# Altium PCB handm_altimeter.PcbDoc
Units mm, origin at the board's own origin, x right, y up, seen from the top; angles counter-clockwise.
Board outline 19 x 29 mm, 2 copper layers (Top Layer, Bottom Layer); 16 components, 14 nets, 60 pads, 16 vias.
Unrouted connection lines stored in the file: 2.
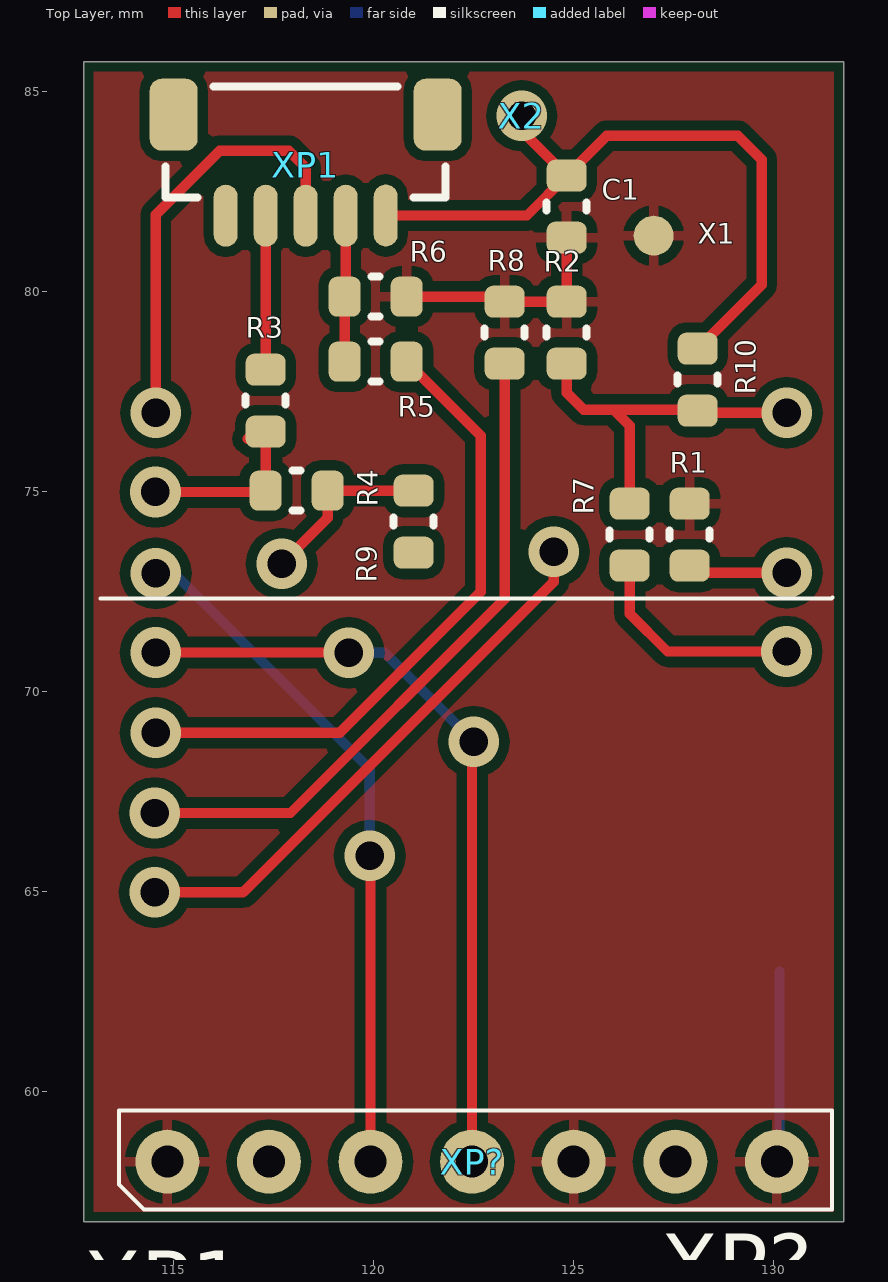
[diagram p0: Top Layer view]
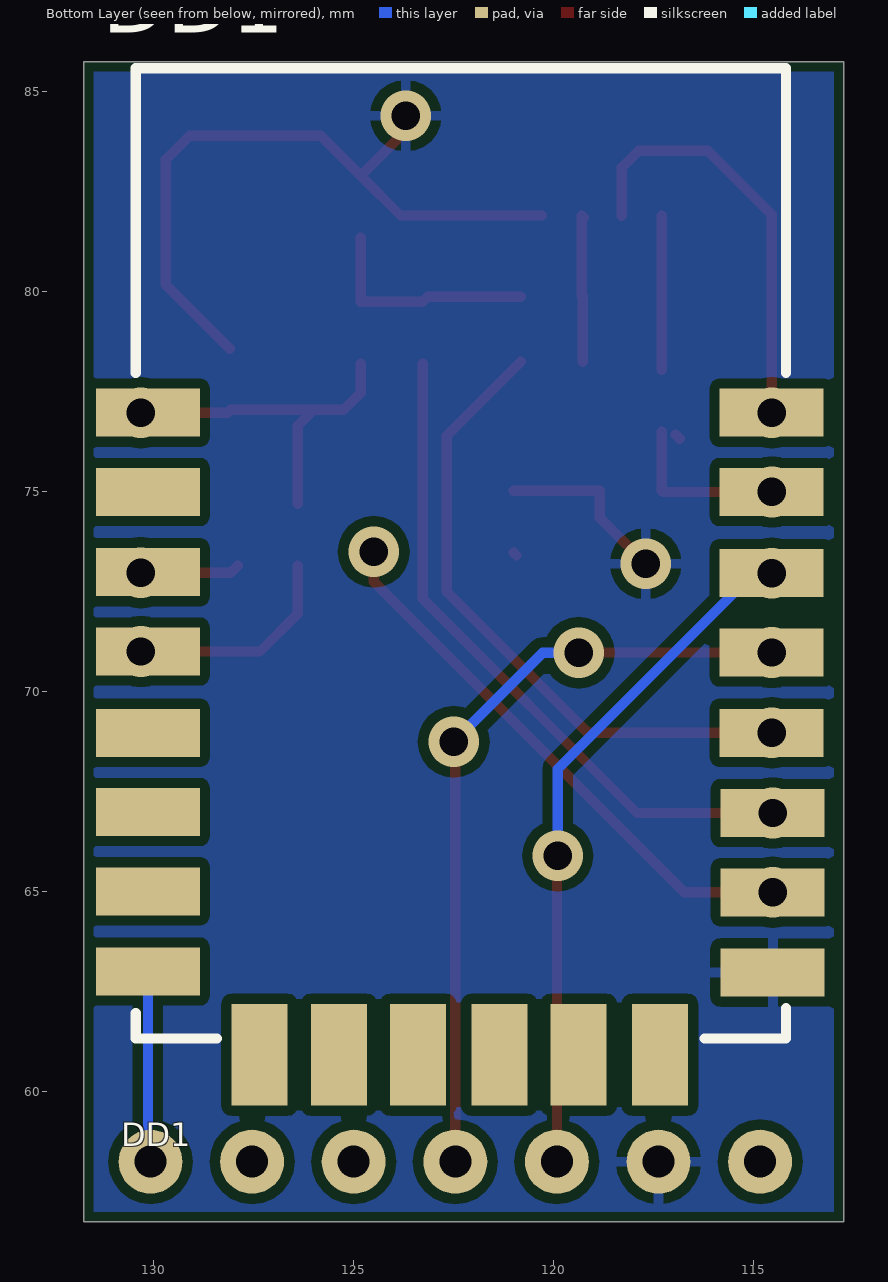
[diagram p1: Bottom Layer view, seen from below]
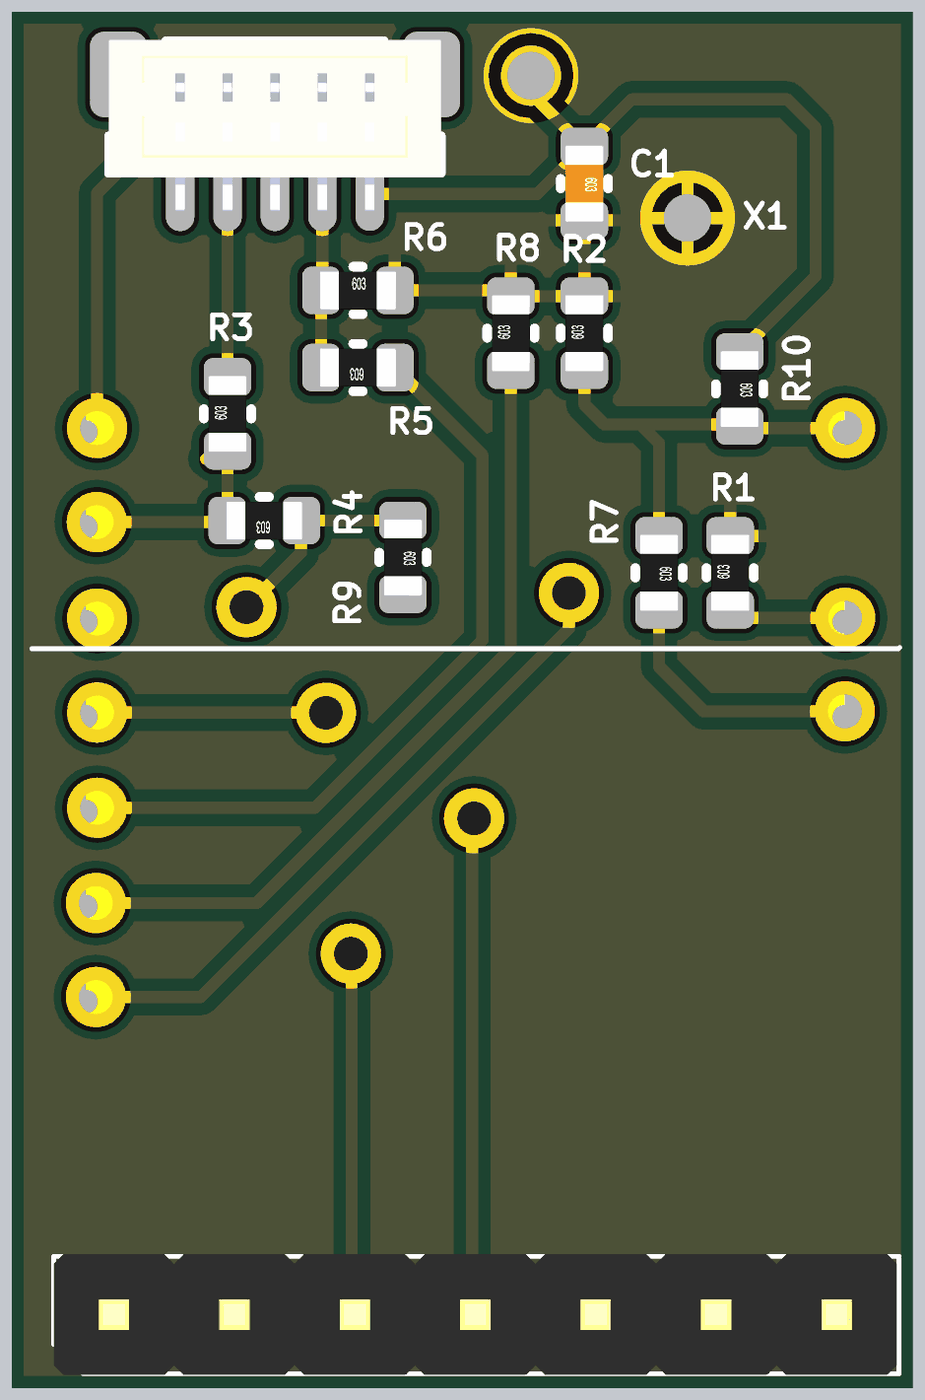
[diagram p2: 3D render of the assembled board from above, using the file's embedded part models]

## Layer stack, top to bottom
Top Solder: solder mask 0.0102, Solder Resist, Dk 3.5
Top Layer: signal copper 0.0356
Dielectric 1: dielectric 0.32, FR-4, Dk 4.8
Bottom Layer: signal copper 0.0356
Bottom Solder: solder mask 0.0102, Solder Resist, Dk 3.5

## Board outline
112.75,56.75 112.75,85.75 131.75,85.75 131.75,56.75

## Design rules (kind name [scope] priority, off if disabled: settings)
Clearance [All] p1: gap=0.254 ignorepadtopadclearanceinfootprint=FALSE except(0: Arc-Hole Track-Hole SMDPad-Hole THPad-Hole Via-Hole Fill-Hole Poly-Hole Region-Hole Text-Hole)
PolygonConnect [All] p1: connectstyle=Relief reliefconductorwidth=0.254 reliefentries=4 polygonreliefangle="90 Angle" airgapwidth=0.254
RoutingVias [All] p1: holewidth=0.711 width=1.27 viastyle="Through Hole" minholewidth=0.711 minwidth=1.27 maxholewidth=0.711 maxwidth=1.27
SolderMaskExpansion [All] p1: expansion=0.102
Width [All] p1: maxlimit=0.254 minlimit=0.254 preferedwidth=0.254
30 further rules are at their usual default settings.

## Components (designator, comment, footprint, x,y, rotation, side; value= is the part's Value field where it differs from the comment)
C1 "Cap EIA 0603" "CAP EIA 0603" 124.825,82.125 r270 top value=0.1uF
DD1 "ESP8266-12E" "ESP8266 ESP-12-E" 113.559,60.567 r180 bottom
R1 "Res EIA 0603" "RES EIA 0603" 127.9,73.925 r90 top value=10k
R2 "Res EIA 0603" "RES EIA 0603" 124.825,78.975 r90 top value=10k
R3 "Res EIA 0603" "RES EIA 0603" 117.3,77.275 r90 top value=10k
R4 "Res EIA 0603" "RES EIA 0603" 118.075,75.025 r180 top value=22k
R5 "BURN" "RES EIA 0603" 120.05,78.25 r180 top
R6 "Res EIA 0603" "RES EIA 0603" 120.05,79.875 r0 top value=10k
R7 "Res EIA 0603" "RES EIA 0603" 126.4,73.925 r270 top value=470
R8 "Res EIA 0603" "RES EIA 0603" 123.275,78.975 r90 top value=10k
R9 "Res EIA 0603" "RES EIA 0603" 121,74.25 r270 top value=10k
R10 "Res EIA 0603" "RES EIA 0603" 128.1,77.8 r270 top value=0
X1 "V_Bat+" "Pin - Referal" 127,81.4 r0 top value="Generic Pin Contact Referal"
X2 "V_Bat_GND" "Pin - Referal" 123.7,84.4 r0 top value="Generic Pin Contact Referal"
XP1 "BM05B-SRSS-TB" BM05B-SRSS-TB 118.3,83.625 r0 top value="Разъем штыревой 5-и контактный угловой"
XP? "PLS-7v1" PLS-7v1 122.46,58.25 r0 top

## Footprints (in the part's own frame and the unit in brackets; to place one, negate y for a bottom-side part, rotate by r counter-clockwise, add the part's x,y. Pads: shape width x height; smd on the part's side, far side on the other; paste and mask are expansions set on the pad)
BM05B-SRSS-TB [mm]
  rrect50% 1.2x1.8 smd: 0(-3.3,0.8) 0(3.3,0.8)
  oval 0.6x1.55 smd: 1(-2,-1.725) 2(-1,-1.725) 3(0,-1.725) 4(1,-1.725) 5(2,-1.72)
  silkscreen extent -3.5,-1.28 3.5,1.5, body extent -3.5,-2.07 3.5,1.53, height 4.25
"CAP EIA 0603" [mm] "Chip Resistor, 2-Leads, Body 1.57x0.85mm, IPC Medium Density"
  rrect50% 0.8x1 smd: 1(-0.775,0) 2(0.775,0)
  silkscreen extent -0.1,-0.5 0.1,0.5, body extent -0.8,-0.4 0.8,0.4, height 0.3
"ESP8266 ESP-12-E" [mil] "ESP8266 ESP-12-E"
  rect 102.36x47.24 smd: 1(-653,646) 2(-653,568) 3(-653,489) 4(-653,411) 5(-653,331) 6(-653,253) 7(-653,175) 8(-653,96) 15(-38,95) 16(-38,174) 17(-38,252) 18(-39,331) 19(-39,410) 20(-39,488) 21(-39,568) 22(-39,646)
  rect 55x100 smd: 9(-543,14) 10(-465,14) 11(-387,14) 12(-307,14) 13(-229,14) 14(-149,14)
  silkscreen extent -665,30 -25,985, body extent -660,32 -29,977, height 104
"Pin - Referal" [mm]
  round 1 smd mask+0.5: 1(0,0)
PLS-7v1 [mm]
  round 1.6 hole 0.8: 1(-7.62,0) 2(-5.08,0) 3(-2.54,0) 4(0,0) 5(2.54,0) 6(5.08,0) 7(7.62,0)
  silkscreen extent -8.82,-1.2 9,1.28, body extent -8.82,-1.22 8.96,1.32, height 8.54
"RES EIA 0603" [mm] "Chip Resistor, 2-Leads, Body 1.57x0.85mm, IPC Medium Density"
  rrect50% 0.8x1 smd: 1(-0.775,0) 2(0.775,0)
  silkscreen extent -0.1,-0.5 0.1,0.5, body extent -0.8,-0.4 0.8,0.4, height 0.3

## Part data
DD1: library part "ESP8266 ESP-12E-RU"
R5: library part "Res EIA 0603", Group=Резисторы
X1 X2: library part Pin_Referal, "Generic Pin Contact", Manufacturer=-, Group=-, Name=-, Supplier=-
XP1: "5-Pin Angle Connector", Manufacturer=JST, Group=Разъемы, Name=BM05B-SRSS-TB, Supplier="ООО\"Компэл\""
C1: Group=Конденсаторы
R1 R2 R3 R4 R6 R7 R8 R9 R10: Group=Резисторы

## Via types
v1: diameter 1.27, hole 0.711, Top Layer to Bottom Layer, 16 vias

## Nets (pads, with @x,y where several pads share a name; then routed paths per layer and width w, separated by ;. In a path a pad name is that pad's centre, name@x,y a point inside that pad or via, vN(x,y) a via of type N, cw(c..) or ccw(c..) an arc to the next point about the centre after c; other vN are vias at no path point)
+3.3V: C1.2 DD1.8 R1.2 R2.2 R6.2 R8.2 X1.1 XP?.1 XP?.5 XP?.7 | length 10.4
  Top Layer w0.254: R6.2 123.15,79.875 R8.2 R2.2 C1.2
  Bottom Layer w0.254: XP?.7 130.146,58.316 DD1.8
Ardu_RX: R3.2 XP1.2 | length 3.8
  Top Layer w0.254: R3.2 XP1.2
Ardu_TX: DD1.22 XP1.3 | length 10.7
  Top Layer w0.254: v1(114.55,76.975) 114.55,81.925 116.15,83.525 117.875,83.525 118.3,83.1 XP1.3
DTR: R5.2 R6.1 XP1.4 | length 3.7
  Top Layer w0.254: XP1.4@119.25,81.85 XP1.4 119.3,79.9 R6.1 R5.2
GND: C1.1 DD1.15 R4.1 R9.1 R10.1 X2.1 XP1.5 XP?.2 | length 22.3
  Top Layer w0.254: v1(117.7,73.2) 118.85,74.35 R4.1 R9.1 ; XP1.5 123.83,81.905 C1.1 ; v1(123.7,84.4) 123.7,84.025 C1.1 ; R10.1 129.7,80.175 129.7,83.3 129.1,83.9 125.825,83.9 C1.1
NetDD1_3: DD1.3 R1.1 | length 2.5
  Top Layer w0.254: R1.1 128.075,72.975 v1(130.325,72.975)
NetDD1_4: DD1.4 R7.2 | length 5.7
  Top Layer w0.254: R7.2 126.4,71.95 127.344,71.006 v1(130.319,71.006)
  Bottom Layer w0.254: DD1.4 v1(130.319,71.006)
NetDD1_16: DD1.16 R9.2 | length 14
  Top Layer w0.254: v1(114.525,64.986) 116.736,64.986 124.5,72.75 v1(124.5,73.5) ; R9.2@120.931,73.406 R9.2
NetDD1_17: DD1.17 R8.1 | length 16.8
  Top Layer w0.254: v1(114.525,66.967) 117.917,66.967 123.275,72.325 R8.1
NetDD1_18: DD1.18 R5.1 | length 16.1
  Top Layer w0.254: v1(114.55,68.974) 119.149,68.974 122.675,72.5 122.675,76.4 R5.1
NetDD1_21: DD1.21 R3.1 R4.2 | length 4.4
  Top Layer w0.254: v1(114.544,74.994) 117.269,74.994 R4.2 R3.1 ; R3.1@116.85,76.325 R3.1@116.95,76.425
  Bottom Layer w0.254: v1(114.544,74.994) DD1.21
RTS: DD1.1 R2.1 R7.1 R10.2 XP1.1 | length 9.1
  Top Layer w0.254: R2.1 124.825,77.475 125.25,77.05 126,77.05 ; R7.1 126.4,76.65 126,77.05 ; v1@130.25,77.05 v1(130.325,76.975) 128.15,76.975 R10.2 128.075,77.05 126,77.05
  Bottom Layer w0.254: v1(130.325,76.975) DD1.1@130.4,76.975
SCL: DD1.20 XP?.3 | length 17.2
  Top Layer w0.254: v1(119.9,65.9) 119.92,65.88 XP?.3
  Bottom Layer w0.254: v1(114.55,72.962) 115.008,72.962 119.9,68.069 v1(119.9,65.9)
SDA: DD1.19 XP?.4 | length 19.4
  Top Layer w0.254: v1(114.55,70.981) 119.369,70.981 v1(119.375,70.975) ; XP?.4 122.46,68.71 v1(122.5,68.75)
  Bottom Layer w0.254: v1(119.375,70.975) 120.275,70.975 v1(122.5,68.75)
pads on no net: DD1.2 DD1.5 DD1.6 DD1.7 DD1.9 DD1.10 DD1.11 DD1.12 DD1.13 DD1.14 XP1.0 XP?.6

## Polygon pours and split planes (outlines as drawn)
+3.3V on Top Layer "Top Layer-No Net" (solid, pour order 0): 113,57 131.5,57 131.5,85.5 113,85.5
GND on Bottom Layer "Top Layer-No Net" (solid, pour order 2): 113,57 131.5,57 131.5,85.5 113,85.5

## Silkscreen, mask and mechanical layers (free items; w line width, h text height)
Top Overlay:
  lines w0.1: 113.175,72.325 131.45,72.325 131.475,72.35
Mechanical 1:
  the board outline again, w0.1

## Text inside footprints (layer, text, board x,y; h text height)
DD1: Mechanical 13 "ANTENNA AREA" at 130.145,84.966 h0.25; Mechanical 13 "CUTOUT POLYGON" at 130.145,84.458 h0.25